# EAGLE board FreshBytes - Copy (EAGLE 9.1.0)
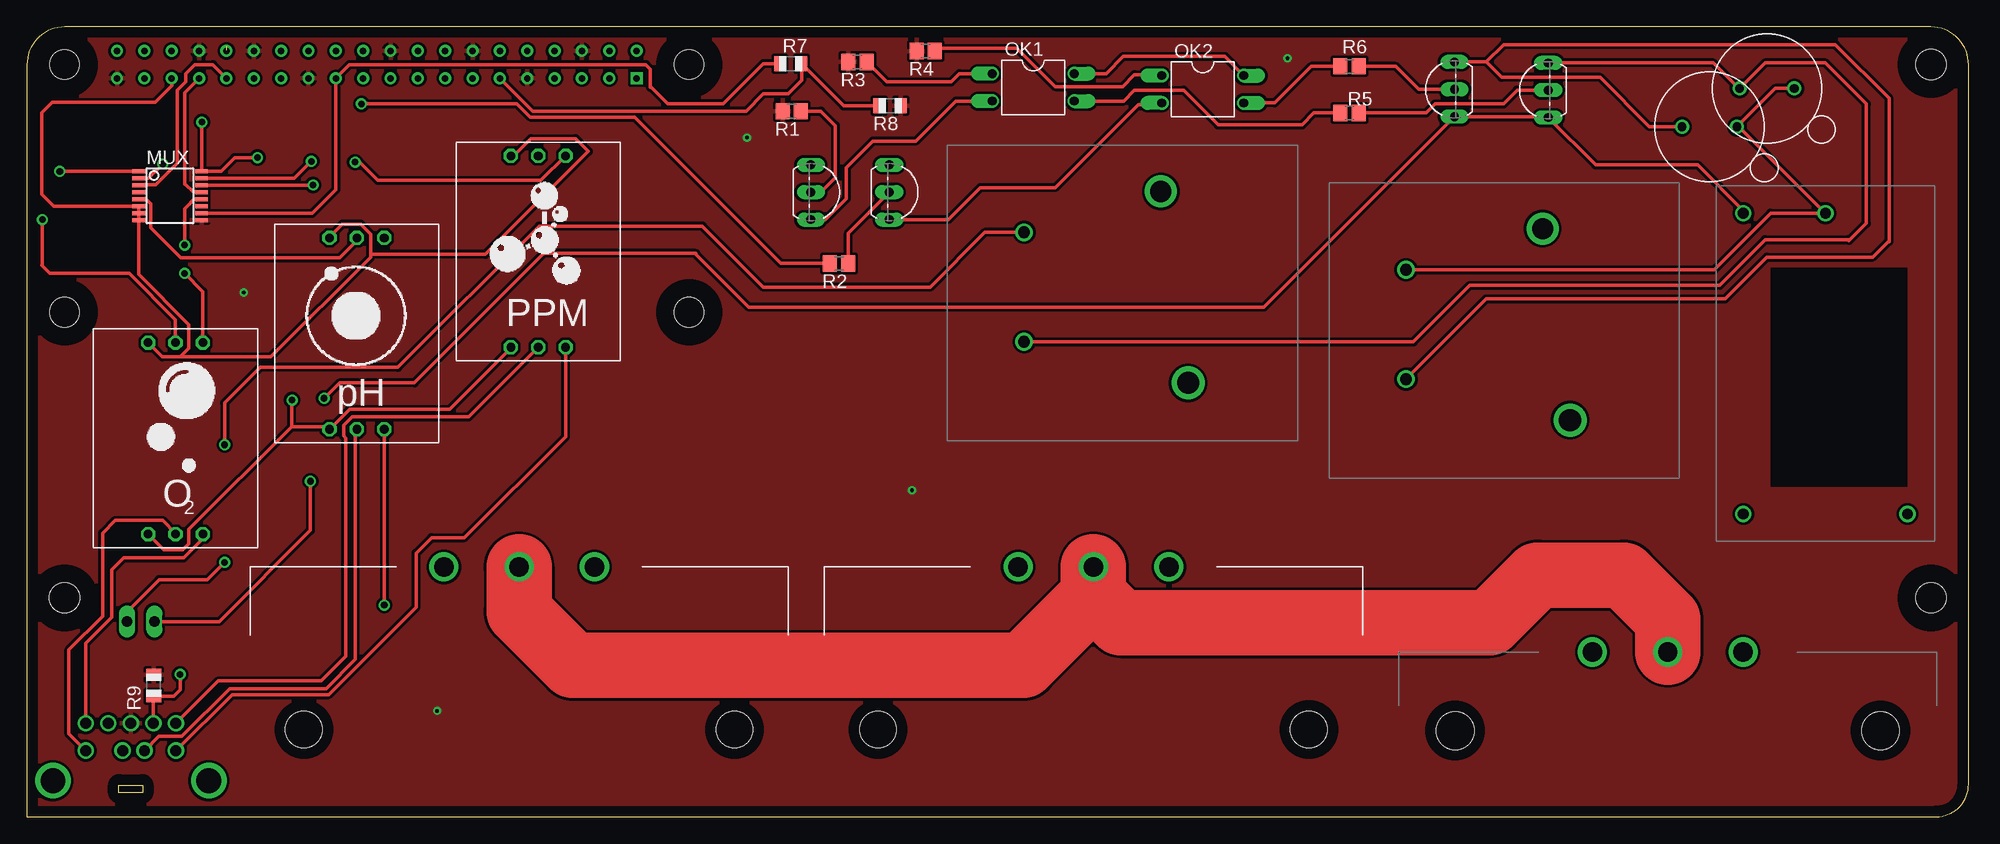
[diagram p0: board, top side]
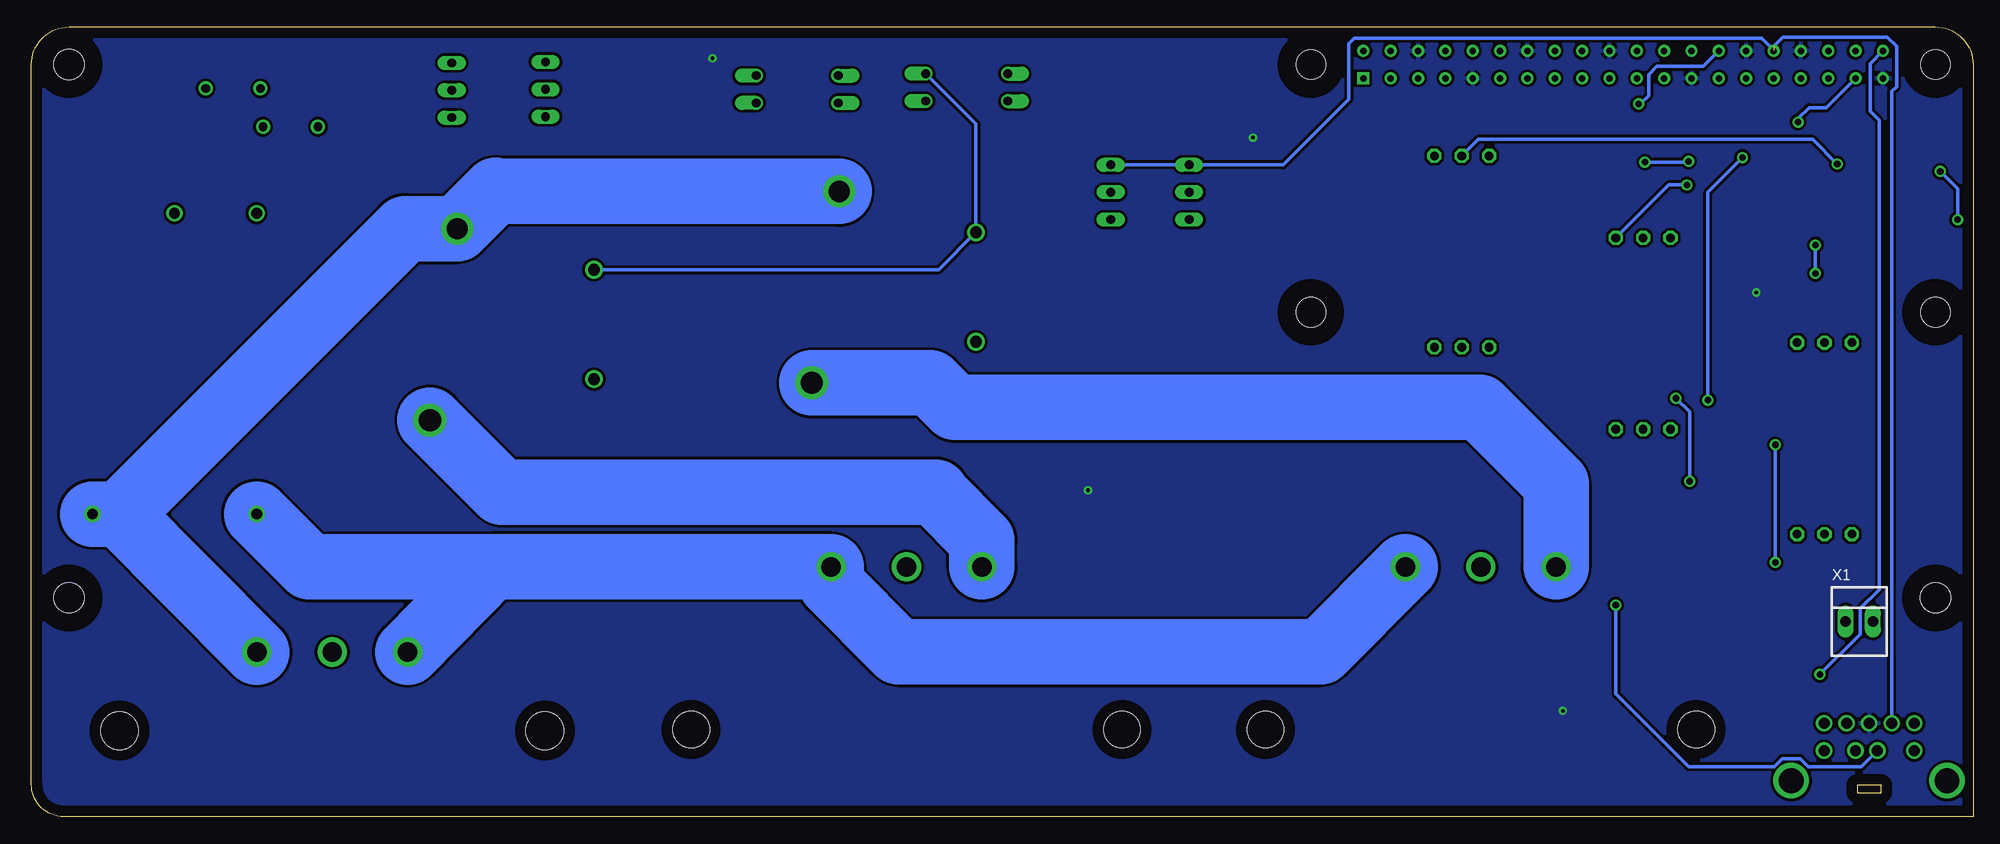
[diagram p1: board, bottom side, seen from below]

Size 180.34 x 73.35 mm. Coordinates in mm from the lower left corner, seen from the top.
Outline: 0,0 177.34,0 arc90 180.34,3 180.34,69.85 arc90 176.83,73.35 3.51,73.35 arc90 0,69.85 0,0
Copper layers (1*16): Top 0.035mm / dielectric 1.5mm / Bottom 0.035mm
Design rules "default": minimum track width 10mil, minimum drill 24mil, track to track 8mil, track to pad 8mil, pad to pad 8mil, via to via 8mil, smd to smd 8mil, copper to edge 40mil, drill to drill 8mil, minimum pad ring 10mil, minimum via ring 8mil, stop-mask expansion 4mil, vias tented up to drill 0mil, thermal gap 10mil
Net classes: 0 default: width 0.305 mm, drill 0.508 mm, clearance 0.254 mm; 1 Power: width 5.715 mm, drill 5.715 mm, clearance 0.508 mm
Holes 2.8 mm at 3.5,20.32 176.84,69.85 176.84,20.32
tRestrict: area 175.3,18.8 to 178.4,21.9; area 175.3,68.3 to 178.4,71.4; area 2,18.8 to 5,21.9
bRestrict: area 2,18.8 to 5,21.9; area 175.3,68.3 to 178.4,71.4; area 175.3,18.8 to 178.4,21.9

## Footprints (pad centres in the part's own frame; a part is rotated, then mirrored left to right if it is on the bottom)
SSOP16 = smd 0.4 x 1.2: 0X 0.325,2.925; 0Y -2.275,-2.925; 1X -0.975,2.925; 1Y 0.325,-2.925; 2X -1.625,2.925; 2Y -1.625,-2.925; 3X 0.975,2.925; 3Y -0.325,-2.925; A 1.625,2.925; B 2.275,2.925; GND 2.275,-2.925; INH 0.975,-2.925; VCC -2.275,2.925; VEE 1.625,-2.925; X-COM -0.325,2.925; Y-COM -0.975,-2.925
DIL04 = drill 0.813 offset: 1 -1.27,-3.81; 2 1.27,-3.81; 3 1.27,3.81; 4 -1.27,3.81
R0805 = smd 1.3 x 1.5: 1 -0.85,0; 2 0.85,0
R0805' = smd 1.1 x 1.4: 1 -1,0; 2 1,0
TO92-EBC-OVAL = drill 0.813 long: B 0,-1.27; C 2.54,-1.27; E -2.54,-1.27
POWER_IN = drill 1.8: GND 0,0; HOT 7,0; NEUTRAL -7,0 | hole 3.5: -19.75,-7.3; 19.75,-7.3
VTB8441BH = drill 0.8: ANODE 2.54,0; CATH -2.54,0
9POS_MINI_DIN = drill 2.286: E1 -7.239,-5.588; E2 7.239,-5.588 | drill 1.016: P1 -1.27,-8.382; P2 0.762,-8.382; P3 -4.191,-8.382; P4 -2.095,-10.922; P5 0,-10.922; P6 4.191,-8.382; P7 -4.191,-10.922; P8 2.095,-10.922; P9 4.191,-10.922
ATLAS_DO_WITH_ICON = drill 0.8 octagon: GND -2.54,8.89; PGND 2.54,-8.89; PRB 0,-8.89; RX 2.54,8.89; TX 0,8.89; VCC -2.54,-8.89
IEC_FEMALE = drill 1.803: GROUND 0,0; HOT -7,0; NEUTRAL 7,0 | hole 3.404: -20,-15.1; 20,-15.1
ATLAS_PH_WITH_ICON = drill 0.8 octagon: GND -2.54,8.89; PGND 2.54,-8.89; PRB 0,-8.89; RX 2.54,8.89; TX 0,8.89; VCC -2.54,-8.89
ATLAS_PPM_WITH_ICON = drill 0.8 octagon: GND -2.54,8.89; PRB 0,-8.89; PRB2 2.54,-8.89; RX 2.54,8.89; TX 0,8.89; VCC -2.54,-8.89
RELAY = drill 1.092: COIL1 -13.97,-15.24; COIL2 -3.81,-15.24 | drill 1.981: COM -17.78,-2.54 | drill 2.057: NO 0,0
RPI_ZERO = drill 0.6 square: 3.3V 1.27,53.13 | drill 0.6: 3.3V1 1.27,32.81; 5V -1.27,53.13; 5V1 -1.27,50.59; CLK -1.27,40.43; GND -1.27,48.05; GND1 -1.27,37.89; GND2 -1.27,30.27; GND3 -1.27,17.57; GND4 -1.27,12.49; GND5 1.27,42.97; GND6 1.27,22.65; GND7 1.27,4.87; GPIO4 1.27,45.51; GPIO5 1.27,17.57; GPIO6 1.27,15.03; GPIO7 -1.27,25.19; GPIO8 -1.27,22.65; GPIO12 -1.27,15.03; GPIO13 1.27,12.49; GPIO16 -1.27,9.95; GPIO17 1.27,40.43; GPIO19 1.27,9.95; GPIO20 -1.27,7.41; GPIO21 -1.27,4.87; GPIO22 1.27,35.35; GPIO23 -1.27,35.35; GPIO24 -1.27,32.81; GPIO25 -1.27,27.73; GPIO26 1.27,7.41; GPIO27 1.27,37.89; ID_SC -1.27,20.11; ID_SD 1.27,20.11; MISO 1.27,27.73; MOSI 1.27,30.27; RX -1.27,42.97; SCL 1.27,48.05; SCLK 1.27,25.19; SDA 1.27,50.59; TX -1.27,45.51 | hole 2.75: 0,0; 0,58; 23,58; 23,0
RAC02-05SC_ACDCCONVERTER = drill 1: +VDCOUT 0,0; -VDCOUT 0,7.62; VACIN(L) -27.94,-7.62; VACIN(N) -27.94,7.62
22-23-2021 = drill 1 long: 1 -1.27,0; 2 1.27,0

## Placement (x,y rotation side)
MUX  7HC4052_MUX  [SSOP16]  13.29,57.66 270 top
OK1  PC817  [DIL04]  93.47,67.74 270 top
OK2  PC817  [DIL04]  109.21,67.56 270 top
R1  3.3K  [R0805]  71.04,65.52 180 top
R2  3.3K  [R0805]  75.44,51.38 180 top
R3  200  [R0805]  77.13,70.09 180 top
R4  200  [R0805]  83.48,71.11 180 top
R5  470  [R0805]  122.84,65.35 0 top
R6  470  [R0805]  122.84,69.68 0 top
R7  10K  [R0805']  70.95,69.94 0 top
R8  10K  [R0805']  80.17,66.03 180 top
R9  4.7K  [R0805']  11.77,12.19 270 top
T1  2N2222  [TO92-EBC-OVAL]  74.08,58 270 top
T2  2N2222  [TO92-EBC-OVAL]  81.36,58 270 top
T3  2N2222  [TO92-EBC-OVAL]  140.03,67.47 90 top
T4  2N2222  [TO92-EBC-OVAL]  131.31,67.55 90 top
U$1  POWER_IN  [POWER_IN]  152.4,15.29 0 top
U$2  VTB8441BH  [VTB8441BH]  161.61,67.63 180 top
U$3  VTB8441BH  [VTB8441BH]  156.28,64.08 180 top
U$4  9POS_MINI_DIN  [9POS_MINI_DIN]  9.65,-2.25 180 top
U$5  ATLAS_DO_WITH_ICON  [ATLAS_DO_WITH_ICON]  13.8,35.13 0 top
U$6  IEC_FEMALE  [IEC_FEMALE]  45.72,23.2 0 top
U$7  IEC_FEMALE  [IEC_FEMALE]  99.06,23.2 0 top
U$8  ATLAS_PH_WITH_ICON  [ATLAS_PH_WITH_ICON]  30.65,44.87 0 top
U$9  ATLAS_PPM_WITH_ICON  [ATLAS_PPM_WITH_ICON]  47.49,52.49 0 top
U$11  RELAY  [RELAY]  107.85,40.3 270 top
U$12  RELAY  [RELAY]  143.33,36.83 270 top
U$13  RPI_ZERO  [RPI_ZERO]  3.5,69.85 270 top
U$17  RAC02-05SC_ACDCCONVERTER  [RAC02-05SC_ACDCCONVERTER]  167.04,56.05 90 top
X1  22-23-2021  [22-23-2021]  10.57,18.12 0 bottom

## Library data of the parts
MUX U$2-U$9 U$17 = BloomWall
OK1 OK2 = optocoupler; MPN: PC817X4J000F; OC_FARNELL: 9707727; OC_NEWARK: 97K7059
R1-R6 = resistor
R7-R9 T1-T4 = adafruit
U$1 U$11-U$13 = FreshBytes
X1 = con-molex; MF: MOLEX; MPN: 22-23-2021; OC_FARNELL: 1462926; OC_NEWARK: 25C3832

## Nets
3.3V: U$13.3.3V
3.3V1: U$13.3.3V1
5V: U$13.5V
5V1: U$13.5V1
AGND: T3.E T4.E U$17.-VDCOUT X1.1
DGND: T1.E T2.E U$4.P8 U$13.GPIO12
GND: MUX.B R1.2 R3.2 R4.2 R8.1 R9.1 U$4.P5 U$13.GND U$13.GND1 U$13.GND2 U$13.GND3 U$13.GND4 U$13.GND5 U$13.GND6 U$13.GND7
N$1: R2.2 U$13.ID_SC
N$3: R1.1 T1.B
N$4: OK1.1 R3.1
N$5: OK1.2 T1.C
N$7: MUX.X-COM U$13.GPIO13
N$8: R2.1 T2.B
N$9 [Power]: U$6.HOT U$11.NO
N$10: OK2.1 R4.1
N$11: OK2.2 T2.C
N$12: OK2.3 R6.1
N$13: OK1.3 R5.1
N$14: R5.2 T3.B
N$15: R6.2 T4.B
N$16: T4.C U$3.ANODE U$12.COIL2
N$17 [Power]: U$7.HOT U$12.NO
N$18: T3.C U$2.ANODE U$11.COIL2
N$19 [Power]: U$1.HOT U$11.COM U$12.COM U$17.VACIN(L)
N$20 [Power]: U$1.NEUTRAL U$6.NEUTRAL U$7.NEUTRAL U$17.VACIN(N)
N$21: MUX.Y-COM U$13.GPIO6
N$22: MUX.2Y U$9.TX
N$23: MUX.2X U$9.RX
N$24: MUX.1Y U$8.TX
N$25: MUX.1X U$8.RX
N$26: MUX.0Y U$5.TX
N$27: MUX.0X U$5.RX
N$29: MUX.A R7.1 U$13.SCLK
N$30: MUX.GND MUX.INH MUX.VEE U$5.GND U$8.GND U$9.GND U$13.GPIO19
N$31: U$4.P9 U$5.PGND
N$32: OK1.4 OK2.4 U$2.CATH U$3.CATH U$11.COIL1 U$12.COIL1 U$17.+VDCOUT X1.2
N$33: MUX.VCC U$5.VCC U$8.VCC U$9.VCC U$13.GPIO26
N$34: R7.2 R8.2 U$13.GPIO17
N$36: R9.2 U$4.P4 U$13.GPIO21
N$37: U$4.P7 U$9.PRB
N$38: U$4.P3 U$9.PRB2
N$39: U$4.P1 U$8.PRB
N$40: U$4.P2 U$8.PGND
N$41: U$4.P6 U$5.PRB
PGND [Power]: U$1.GND U$6.GROUND U$7.GROUND

## Tracks (layer width: path | path; a pad name or v marks a point on that pad's centre or on a via)
AGND  (via drill 0.61)
  Top 0.305: U$17.-VDCOUT 159.42,56.29 155.18,60.53 145.7,60.53 T3.E 141.22,65.01 T4.E 114.89,47.32 67.05,47.32 62.14,52.23 62.14,52.32 48,52.32 35.98,40.3 29.04,40.3 v27.6,38.86 | v26.33,31.15 26.33,26.58 17.86,18.12 X1.1 | X1.1
  Bottom 0.305: v27.6,38.86 26.33,37.59 v26.33,31.15
DGND  (1 unrouted)
  Bottom 0.305: U$4.P8 7.56,67.37 7.11,67.81 7.11,71.54 7.96,72.38 17.69,72.38 18.53,71.55 | T2.E T1.E 64.09,60.53 57.99,66.63 57.99,71.79 57.48,72.3 19.64,72.3 | T2.E | 19.64,72.23 19.64,72.3 | 19.64,72.3 18.53,71.19 U$13.GPIO12
GND  (via drill 0.35)
  other vias: 66.88,63.07 82.2,30.31 38.1,9.82 20.15,48.68 117.08,70.44
  pour Top: -2.71,76.2 186.08,76.2 186.08,-3.89 -2.71,-3.89
  pour Bottom: -3.81,76.2 183.04,76.2 183.04,-5.25 -3.81,-5.25
N$1  (via drill 0.61)
  Top 0.305: v31.07,66.2 45.52,66.2 46.75,64.97 56.43,64.97 70.02,51.38 R2.2
  Bottom 0.305: v31.07,66.2 30.9,66.2 30.14,66.97 30.14,68.91 29.38,69.67 25.06,69.67 U$13.ID_SC
N$3
  Top 0.305: T1.B 73.75,58 75.09,59.34 75.09,64.17 73.74,65.52 R1.1
N$4
  Top 0.305: R3.1 79.84,68.23 85.84,68.23 86.61,69 OK1.1
N$5
  Top 0.305: OK1.2 86.28,66.47 82.54,62.73 78.56,62.73 76.11,60.28 76.11,57.4 74.16,55.45 T1.C
N$7
  Top 0.305: MUX.X-COM 16.18,58.03 15.45,58.03 14.73,58.75 14.65,58.75 14.65,67.24 U$13.GPIO13
N$8
  Top 0.305: R2.1 76.29,54.2 T2.B
N$9
  Bottom 6.096: U$11.NO 96.85,40.3 94.56,38.01 45.8,38.01 38.72,30.93 U$6.HOT
N$10
  Top 0.305: R4.1 84.67,71.45 84.76,71.37 91.94,71.37 95.49,67.81 101.76,67.81 102.86,68.91 105.33,68.91 OK2.1
N$11
  Top 0.305: OK2.2 105.23,66.12 103.2,66.12 95.49,58.41 88.55,58.41 85.59,55.45 T2.C
N$12
  Top 0.305: R6.1 119.29,69.68 115.9,66.29 113.03,66.29 OK2.3
N$13
  Top 0.305: OK1.3 101.85,66.47 102.86,67.47 107.43,67.47 110.65,64.26 118.44,64.26 119.54,65.36 121.98,65.36 R5.1
N$14
  Top 0.305: R5.2 129.95,65.36 130.8,66.2 137.15,66.2 138.41,67.47 T3.B
N$15
  Top 0.305: T4.B 129.28,67.55 127.15,69.68 R6.2
N$16
  Top 0.305: U$3.ANODE 150.7,64.08 146.12,68.66 136.98,68.66 135.54,70.1 | 135.54,70.1 T4.C | U$12.COIL2 135.54,48.09 157.72,48.09 161.61,51.98 171.43,51.98 172.87,53.42 172.96,53.42 172.96,66.71 167.96,71.7 137.15,71.7 135.54,70.1
N$17
  Bottom 6.096: U$7.HOT 92.06,25.69 96.34,29.97 96.34,30.14 136.64,30.14 U$12.NO
N$18
  Top 0.305: T3.C 156.62,70.01 159,67.64 U$2.ANODE 161.44,70.01 167.03,70.01 170.84,66.2 170.84,55.11 169.23,53.5 169.15,53.59 161.44,53.59 157.21,49.36 134.01,49.36 128.77,44.11 U$11.COIL2
N$19
  Bottom 6.096: U$1.HOT 172.12,28.11 | 172.12,28.11 U$17.VACIN(L) | 172.12,28.11 145.62,54.61 U$12.COM 137.23,58.16 137.15,58.08 U$11.COM
N$20
  Bottom 6.096: 137.59,23.2 U$7.NEUTRAL 106.06,21.57 99.81,15.32 60.6,15.32 U$6.NEUTRAL | 137.59,23.2 U$1.NEUTRAL | U$17.VACIN(N) 154.51,23.2 137.59,23.2
N$21
  Top 0.305: MUX.Y-COM 10.41,58.68 11.98,58.68 13.97,60.66 13.97,67.47 14.73,68.23 14.73,69 15.58,69.84 17.27,69.84 U$13.GPIO6
N$22  (via drill 0.61)
  Top 0.305: MUX.2Y 11.28,59.29 v12.61,60.62
  Bottom 0.305: v12.61,60.62 14.9,62.9 45.97,62.9 U$9.TX
N$23  (via drill 0.61)
  Top 0.305: MUX.2X 24.83,59.29 v26.41,60.87 | v30.48,60.78 30.9,60.78 32.59,59.09 47.75,59.09 U$9.RX
  Bottom 0.305: v26.41,60.87 26.5,60.78 v30.48,60.78
N$24
  Top 0.305: MUX.1Y 10.41,57.29 11.14,57.29 11.51,56.91 11.51,54.69 14.31,51.9 29.04,51.9 30.65,53.5 U$8.TX
N$25  (via drill 0.61)
  Top 0.305: MUX.1X 26.55,58.64 v26.58,58.67
  Bottom 0.305: v26.58,58.67 28.28,58.67 U$8.RX
N$26  (via drill 0.61)
  Top 0.305: MUX.0Y 3.13,59.94 3.05,59.85 v3.05,59.94 | v1.44,55.45 1.44,51.3 1.35,51.22 2.12,50.46 9.48,50.46 13.8,46.14 U$5.TX
  Bottom 0.305: v3.05,59.94 1.44,58.33 v1.44,55.45
N$27  (via drill 0.61)
  Top 0.305: MUX.0X 15.49,57.34 15.21,57.05 15.21,57.03 14.65,56.47 v14.65,53.08 | v14.65,53.08 14.73,53 | 14.73,53 | 14.73,53 v14.65,53.08 | v14.65,50.46 16.34,48.76 U$5.RX | U$5.RX
  Bottom 0.305: v14.65,53.08 v14.65,50.46
N$29
  Top 0.305: MUX.A 26.49,56.04 28.69,58.24 U$13.SCLK 29.95,69.84 57.48,69.84 57.91,69.42 57.91,67.73 57.99,67.73 59.52,66.2 64.68,66.2 68.41,69.94 R7.1
N$30  (1 unrouted)
  Top 0.305: 13.46,68.57 13.46,67.9 11.94,66.37 2.37,66.37 1.35,65.36 1.35,57.82 2.49,56.69 MUX.INH MUX.VEE MUX.GND 10.37,50.36 15.03,45.7 15.03,43.5 14.24,42.71 | U$5.GND 12.57,42.71 14.24,42.71 | 14.24,42.71 22.64,42.71 31.92,51.98 31.92,52.23 | 31.92,52.23 31.92,54.1 30.98,55.03 29.29,55.03 28.11,53.84 U$8.GND | U$9.GND 45.21,61.38 46.82,62.99 50.96,62.99 52.15,61.8 42.58,52.23 31.92,52.23
N$31
  Top 0.305: U$4.P9 5.46,16.13 7.87,18.54 7.87,22.94 8.97,24.04 14.56,24.04 16.34,25.82 U$5.PGND
N$32  (via drill 0.61)
  Top 0.305: U$2.CATH 162.37,67.64 U$3.CATH 159.01,64.08 U$17.+VDCOUT 161.96,56.05 156.7,50.8 U$12.COIL1 | OK1.4 100.24,69 101.84,70.61 111.25,70.61 OK2.4 | U$11.COIL1 88.98,54.27 83.9,49.19 68.4,49.19 62.73,54.86 47.58,54.86 34.46,41.74 21.67,41.74 18.37,38.44 v18.37,34.54 | v18.37,23.62 16.76,22.01 12.28,22.01 9.3,19.04 X1.2
  Bottom 0.305: 113.02,68.91 OK2.4 | U$12.COIL1 96.09,50.8 U$11.COIL1 92.61,64.34 OK1.4 | v18.37,34.54 v18.37,23.62
N$33  (via drill 0.61)
  Top 0.305: U$5.VCC 12.7,24.8 14.48,24.8 15.03,25.35 15.03,26.68 24.57,36.23 | 24.57,36.23 27.85,36.23 U$8.VCC 29.97,37.84 39.28,37.84 44.95,43.51 U$9.VCC | v16.25,64.51 16.25,59.97 | 16.25,59.97 MUX.VCC | 24.57,36.23 24.57,38.63 v24.64,38.69 | v21.42,61.21 19.3,61.21 18.03,59.94 16.29,59.94 16.25,59.97
  Bottom 0.305: v16.25,64.51 16.25,64.85 15.24,65.86 13.63,65.86 U$13.GPIO26 | v24.64,38.69 24.64,57.99 v21.42,61.21
N$34
  Top 0.305: R8.2 75.86,66.03 R7.2 71.95,68.42 71.96,68.4 70.69,67.13 68.4,67.13 66.8,65.53 46.98,65.53 U$13.GPIO17
N$36  (via drill 0.61)
  Top 0.305: U$4.P4 11.75,11.17 | 11.75,11.17 R9.2 | v14.22,13.21 14.22,11.77 13.63,11.17 11.75,11.17
  Bottom 0.305: v14.22,13.21 10.46,16.96 10.46,19.35 8.72,21.1 8.72,64.68 9.57,65.53 9.57,69.92 U$13.GPIO21
N$37
  Top 0.305: U$4.P7 17.79,12.61 27.34,12.61 29.63,14.9 29.63,35.16 29.42,35.37 29.42,36.33 30.21,37.12 41.02,37.12 U$9.PRB
N$38
  Top 0.305: U$4.P3 19.05,11.34 28.02,11.34 36.15,19.47 36.15,24.47 37.59,25.91 40.64,25.91 50.03,35.3 U$9.PRB2
N$39
  Top 0.305: U$4.P1 12.24,7.45 14.37,7.45 18.82,11.9 27.79,11.9 30.5,14.62 30.5,35.84 U$8.PRB
N$40  (via drill 0.61)
  Top 0.305: U$8.PGND v33.19,19.64 | v33.19,19.64
  Bottom 0.305: U$4.P2 10.37,4.66 15.3,4.66 16.04,5.39 17.74,5.39 18.48,4.66 26.41,4.66 33.19,11.43 | 33.19,11.43 | v33.19,19.64 33.19,11.43
N$41
  Top 0.305: U$4.P6 3.89,7.7 3.89,15.49 7.03,18.62 7.03,26.33 8.21,27.51 12.61,27.51 13.8,26.33 U$5.PRB
PGND
  Top 6.096: U$7.GROUND 99.06,20.56 | 99.06,20.56 101.59,18.03 135.88,18.03 140.28,22.43 148.32,22.43 152.4,18.36 U$1.GND | U$6.GROUND 45.72,19.04 50.71,14.05 92.55,14.05 99.06,20.56